# EAGLE board 11872_sound-detector-big.panel-v11 (EAGLE 7.5.0), part 1 of 4
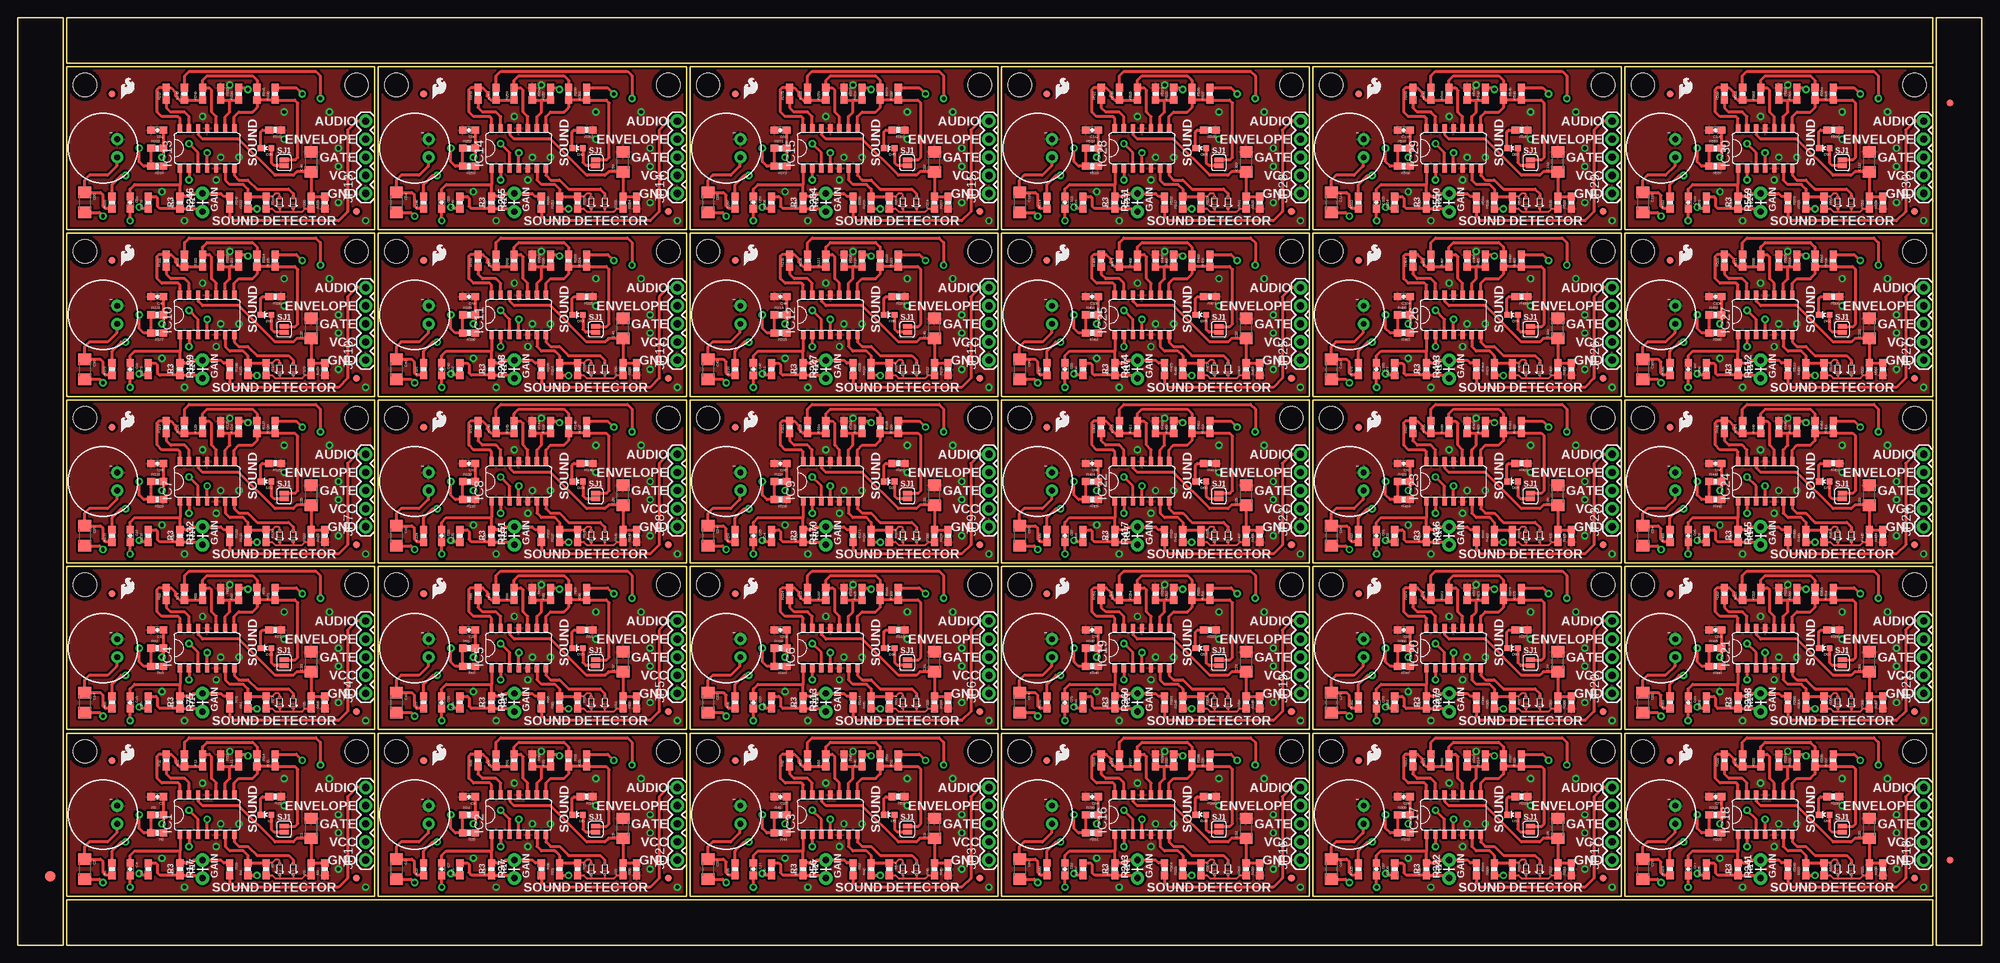
[diagram p0: board, top side]
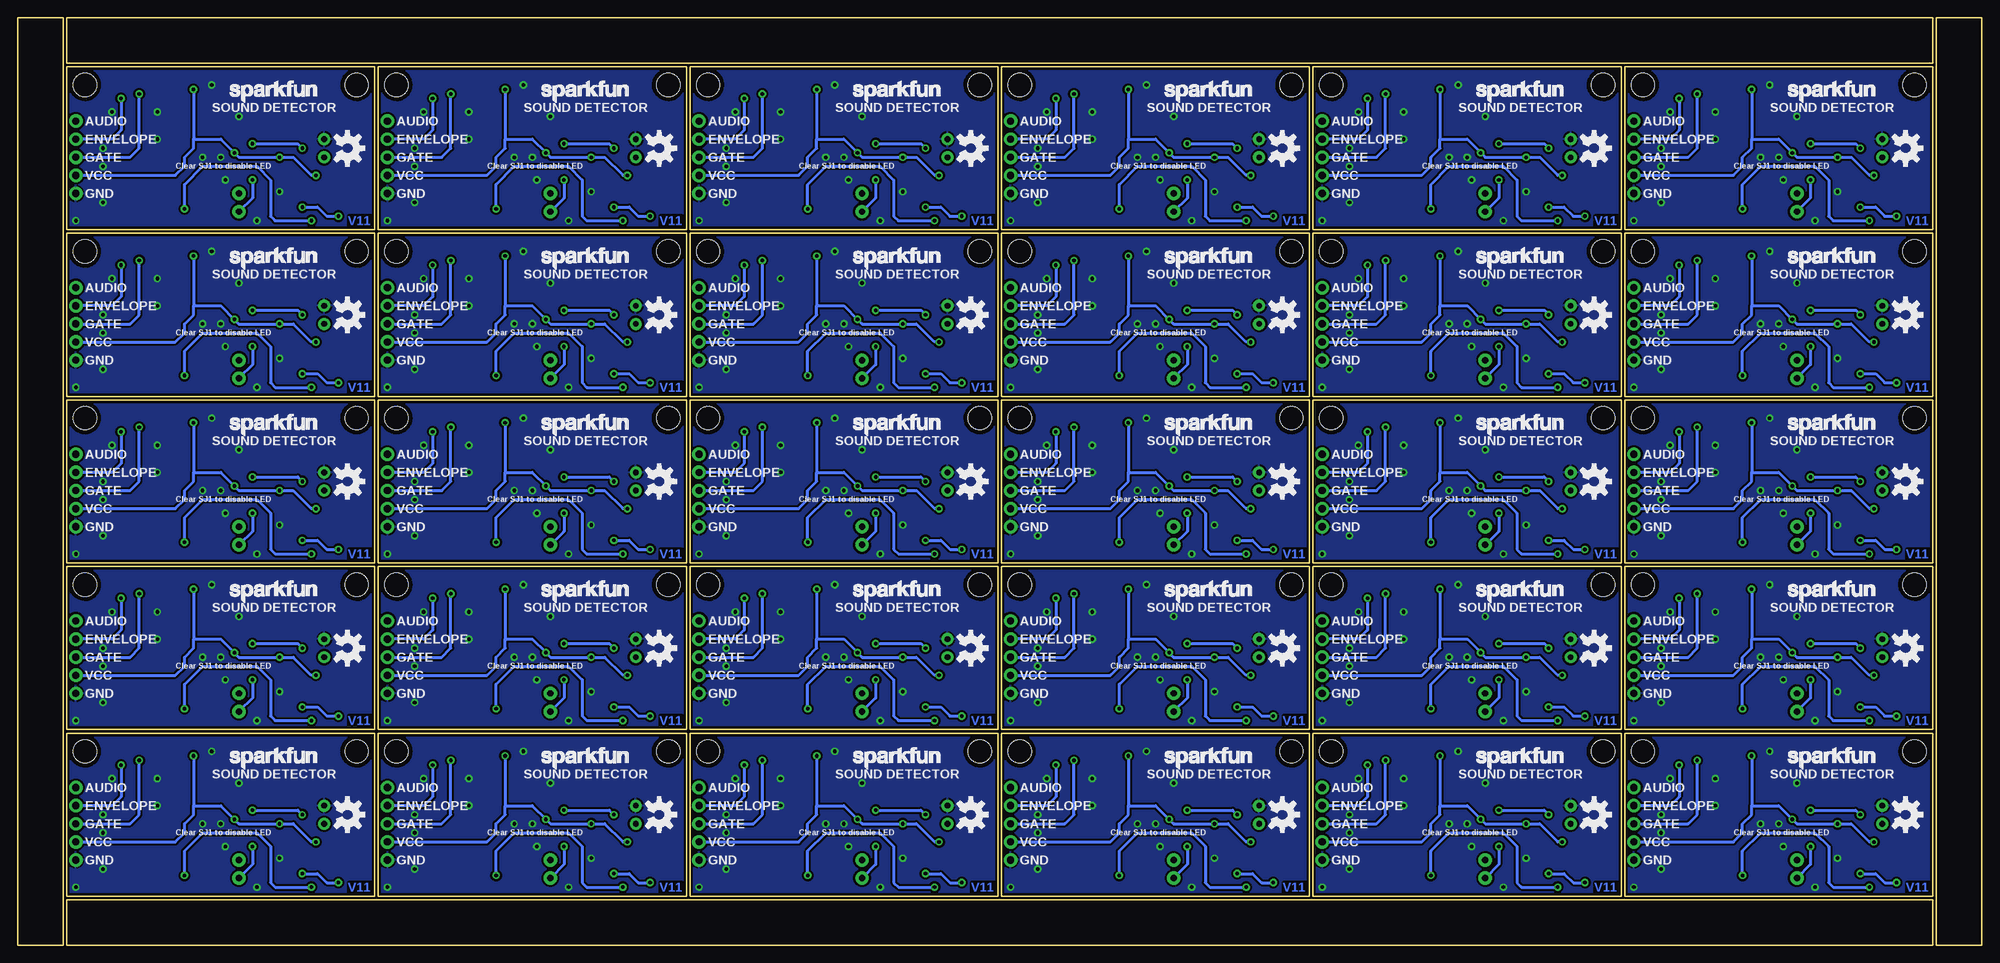
[diagram p1: board, bottom side, seen from below]

Size 275.34 x 130.05 mm. Coordinates in mm from the lower left corner, seen from the top.
Outline: 6.86,6.86 50.04,6.86 50.04,29.72 6.86,29.72 6.86,6.86
Outline: 50.55,6.86 93.73,6.86 93.73,29.72 50.55,29.72 50.55,6.86
Outline: 94.23,6.86 137.41,6.86 137.41,29.72 94.23,29.72 94.23,6.86
Outline: 6.86,30.23 50.04,30.23 50.04,53.09 6.86,53.09 6.86,30.23
Outline: 50.55,30.23 93.73,30.23 93.73,53.09 50.55,53.09 50.55,30.23
Outline: 94.23,30.23 137.41,30.23 137.41,53.09 94.23,53.09 94.23,30.23
Outline: 6.86,53.59 50.04,53.59 50.04,76.45 6.86,76.45 6.86,53.59
Outline: 50.55,53.59 93.73,53.59 93.73,76.45 50.55,76.45 50.55,53.59
Outline: 94.23,53.59 137.41,53.59 137.41,76.45 94.23,76.45 94.23,53.59
Outline: 6.86,76.96 50.04,76.96 50.04,99.82 6.86,99.82 6.86,76.96
Outline: 50.55,76.96 93.73,76.96 93.73,99.82 50.55,99.82 50.55,76.96
Outline: 94.23,76.96 137.41,76.96 137.41,99.82 94.23,99.82 94.23,76.96
Outline: 6.86,100.33 50.04,100.33 50.04,123.19 6.86,123.19 6.86,100.33
Outline: 50.55,100.33 93.73,100.33 93.73,123.19 50.55,123.19 50.55,100.33
Outline: 94.23,100.33 137.41,100.33 137.41,123.19 94.23,123.19 94.23,100.33
Outline: 6.35,0 6.35,130.05 0,130.05 0,0 6.35,0
Outline: 6.86,0 268.48,0 268.48,6.35 6.86,6.35 6.86,0
Outline: 275.34,0 275.34,130.05 268.99,130.05 268.99,0 275.34,0
Outline: 268.48,130.05 6.86,130.05 6.86,123.7 268.48,123.7 268.48,130.05
Outline: 137.92,6.86 181.1,6.86 181.1,29.72 137.92,29.72 137.92,6.86
Outline: 181.61,6.86 224.79,6.86 224.79,29.72 181.61,29.72 181.61,6.86
Outline: 225.3,6.86 268.48,6.86 268.48,29.72 225.3,29.72 225.3,6.86
Outline: 137.92,30.23 181.1,30.23 181.1,53.09 137.92,53.09 137.92,30.23
Outline: 181.61,30.23 224.79,30.23 224.79,53.09 181.61,53.09 181.61,30.23
Outline: 225.3,30.23 268.48,30.23 268.48,53.09 225.3,53.09 225.3,30.23
Outline: 137.92,53.59 181.1,53.59 181.1,76.45 137.92,76.45 137.92,53.59
Outline: 181.61,53.59 224.79,53.59 224.79,76.45 181.61,76.45 181.61,53.59
Outline: 225.3,53.59 268.48,53.59 268.48,76.45 225.3,76.45 225.3,53.59
Outline: 137.92,76.96 181.1,76.96 181.1,99.82 137.92,99.82 137.92,76.96
Outline: 181.61,76.96 224.79,76.96 224.79,99.82 181.61,99.82 181.61,76.96
Outline: 225.3,76.96 268.48,76.96 268.48,99.82 225.3,99.82 225.3,76.96
Outline: 137.92,100.33 181.1,100.33 181.1,123.19 137.92,123.19 137.92,100.33
Outline: 181.61,100.33 224.79,100.33 224.79,123.19 181.61,123.19 181.61,100.33
Outline: 225.3,100.33 268.48,100.33 268.48,123.19 225.3,123.19 225.3,100.33
Copper layers (1*16): Top 0.035mm / dielectric 1.5mm / Bottom 0.035mm
Design rules "SparkFun-2-layer *": minimum track width 7mil, minimum drill 15mil, track to track 8mil, track to pad 8mil, pad to pad 8mil, via to via 8mil, smd to smd 8mil, copper to edge 8mil, drill to drill 8mil, minimum pad ring 12mil, minimum via ring 10mil, stop-mask expansion 4mil, vias tented up to drill 20mil, thermal gap 10mil

## Footprints (pad centres in the part's own frame; a part is rotated, then mirrored left to right if it is on the bottom)
1206 = smd 1.6 x 1.8: 1 -1.4,0; 2 1.4,0
0603-CAP = smd 1.1 x 1: 1 -0.85,0; 2 0.85,0
SOD-523 = smd 0.4 x 0.4: A -0.7,0; C 0.7,0
LED-0603 = smd 0.8 x 0.8: A 0,-0.75; C 0,0.75
FIDUCIAL-1.5X3 = smd 1.5 x 1.5: 1 0,0
FIDUCIAL-1X2 = smd 1 x 1: 1 0,0
SO014 = smd 0.6 x 1.2: 1 -3.175,-2.8; 2 -1.905,-2.8; 3 -0.635,-2.8; 4 0.635,-2.8; 5 1.905,-2.8; 6 3.175,-2.8; 7 4.445,-2.8; 8 4.445,2.8; 9 3.175,2.8; 10 1.905,2.8; 11 0.635,2.8; 12 -0.635,2.8; 13 -1.905,2.8; 14 -3.175,2.8
1X05 = drill 1.016 pad 1.88: 1 0,0; 2 2.54,0; 3 5.08,0; 4 7.62,0; 5 10.16,0
MIC-9.7MM = drill 0.8 pad 1.676: 1 -2,1.27; 2 -2,-1.27
0603-RES = smd 1.1 x 1: 1 -0.85,0; 2 0.85,0
AXIAL-0.1EZ = drill 0.9 pad 1.88: P$1 0,0; P$2 2.54,0
SJ_2S = smd 0.635 x 1.27: 1 -0.412,0; 2 0.412,0
STAND-OFF = hole 3.302: 0,0

## Placement (x,y rotation side)
C1  10uF  [1206]  41.15,16.38 90 top
C2  10uF  [1206]  9.4,10.67 270 top
C3  1.0uF  [0603-CAP]  19.56,20.83 180 top
C4  1.0uF  [0603-CAP]  15.75,10.67 270 top
C5  10uF  [1206]  84.84,16.38 90 top
C6  10uF  [1206]  53.09,10.67 270 top
C7  1.0uF  [0603-CAP]  59.44,10.67 270 top
C8  1.0uF  [0603-CAP]  63.25,20.83 180 top
C9  10uF  [1206]  128.52,16.38 90 top
C10  10uF  [1206]  96.77,10.67 270 top
C11  1.0uF  [0603-CAP]  103.12,10.67 270 top
C12  1.0uF  [0603-CAP]  106.93,20.83 180 top
C13  10uF  [1206]  41.15,39.75 90 top
C14  10uF  [1206]  9.4,34.04 270 top
C15  1.0uF  [0603-CAP]  15.75,34.04 270 top
C16  1.0uF  [0603-CAP]  19.56,44.2 180 top
C17  10uF  [1206]  84.84,39.75 90 top
C18  10uF  [1206]  53.09,34.04 270 top
C19  1.0uF  [0603-CAP]  59.44,34.04 270 top
C20  1.0uF  [0603-CAP]  63.25,44.2 180 top
C21  10uF  [1206]  128.52,39.75 90 top
C22  10uF  [1206]  96.77,34.04 270 top
C23  1.0uF  [0603-CAP]  103.12,34.04 270 top
C24  1.0uF  [0603-CAP]  106.93,44.2 180 top
C25  10uF  [1206]  41.15,63.12 90 top
C26  10uF  [1206]  9.4,57.4 270 top
C27  1.0uF  [0603-CAP]  15.75,57.4 270 top
C28  1.0uF  [0603-CAP]  19.56,67.56 180 top
C29  10uF  [1206]  84.84,63.12 90 top
C30  10uF  [1206]  53.09,57.4 270 top
C31  1.0uF  [0603-CAP]  59.44,57.4 270 top
C32  1.0uF  [0603-CAP]  63.25,67.56 180 top
C33  10uF  [1206]  128.52,63.12 90 top
C34  10uF  [1206]  96.77,57.4 270 top
C35  1.0uF  [0603-CAP]  103.12,57.4 270 top
C36  1.0uF  [0603-CAP]  106.93,67.56 180 top
C37  10uF  [1206]  41.15,86.49 90 top
C38  10uF  [1206]  9.4,80.77 270 top
C39  1.0uF  [0603-CAP]  15.75,80.77 270 top
C40  1.0uF  [0603-CAP]  19.56,90.93 180 top
C41  10uF  [1206]  84.84,86.49 90 top
C42  10uF  [1206]  53.09,80.77 270 top
C43  1.0uF  [0603-CAP]  59.44,80.77 270 top
C44  1.0uF  [0603-CAP]  63.25,90.93 180 top
C45  10uF  [1206]  128.52,86.49 90 top
C46  10uF  [1206]  96.77,80.77 270 top
C47  1.0uF  [0603-CAP]  103.12,80.77 270 top
C48  1.0uF  [0603-CAP]  106.93,90.93 180 top
C49  10uF  [1206]  41.15,109.86 90 top
C50  10uF  [1206]  9.4,104.14 270 top
C51  1.0uF  [0603-CAP]  15.75,104.14 270 top
C52  1.0uF  [0603-CAP]  19.56,114.3 180 top
C53  10uF  [1206]  84.84,109.86 90 top
C54  10uF  [1206]  53.09,104.14 270 top
C55  1.0uF  [0603-CAP]  59.44,104.14 270 top
C56  1.0uF  [0603-CAP]  63.25,114.3 180 top
C57  10uF  [1206]  128.52,109.86 90 top
C58  10uF  [1206]  96.77,104.14 270 top
C59  1.0uF  [0603-CAP]  103.12,104.14 270 top
C60  1.0uF  [0603-CAP]  106.93,114.3 180 top
C61  10uF  [1206]  172.21,16.38 90 top
C62  10uF  [1206]  140.46,10.67 270 top
C63  1.0uF  [0603-CAP]  146.81,10.67 270 top
C64  1.0uF  [0603-CAP]  150.62,20.83 180 top
C65  10uF  [1206]  215.9,16.38 90 top
C66  10uF  [1206]  184.15,10.67 270 top
C67  1.0uF  [0603-CAP]  190.5,10.67 270 top
C68  1.0uF  [0603-CAP]  194.31,20.83 180 top
C69  10uF  [1206]  259.59,16.38 90 top
C70  10uF  [1206]  227.84,10.67 270 top
C71  1.0uF  [0603-CAP]  234.19,10.67 270 top
C72  1.0uF  [0603-CAP]  238,20.83 180 top
C73  10uF  [1206]  172.21,39.75 90 top
C74  10uF  [1206]  140.46,34.04 270 top
C75  1.0uF  [0603-CAP]  146.81,34.04 270 top
C76  1.0uF  [0603-CAP]  150.62,44.2 180 top
C77  10uF  [1206]  215.9,39.75 90 top
C78  10uF  [1206]  184.15,34.04 270 top
C79  1.0uF  [0603-CAP]  190.5,34.04 270 top
C80  1.0uF  [0603-CAP]  194.31,44.2 180 top
C81  10uF  [1206]  259.59,39.75 90 top
C82  10uF  [1206]  227.84,34.04 270 top
C83  1.0uF  [0603-CAP]  234.19,34.04 270 top
C84  1.0uF  [0603-CAP]  238,44.2 180 top
C85  10uF  [1206]  172.21,63.12 90 top
C86  10uF  [1206]  140.46,57.4 270 top
C87  1.0uF  [0603-CAP]  146.81,57.4 270 top
C88  1.0uF  [0603-CAP]  150.62,67.56 180 top
C89  10uF  [1206]  215.9,63.12 90 top
C90  10uF  [1206]  184.15,57.4 270 top
C91  1.0uF  [0603-CAP]  190.5,57.4 270 top
C92  1.0uF  [0603-CAP]  194.31,67.56 180 top
C93  10uF  [1206]  259.59,63.12 90 top
C94  10uF  [1206]  227.84,57.4 270 top
C95  1.0uF  [0603-CAP]  234.19,57.4 270 top
C96  1.0uF  [0603-CAP]  238,67.56 180 top
C97  10uF  [1206]  172.21,86.49 90 top
C98  10uF  [1206]  140.46,80.77 270 top
C99  1.0uF  [0603-CAP]  146.81,80.77 270 top
C100  1.0uF  [0603-CAP]  150.62,90.93 180 top
C101  10uF  [1206]  215.9,86.49 90 top
C102  10uF  [1206]  184.15,80.77 270 top
C103  1.0uF  [0603-CAP]  190.5,80.77 270 top
C104  1.0uF  [0603-CAP]  194.31,90.93 180 top
C105  10uF  [1206]  259.59,86.49 90 top
C106  10uF  [1206]  227.84,80.77 270 top
C107  1.0uF  [0603-CAP]  234.19,80.77 270 top
C108  1.0uF  [0603-CAP]  238,90.93 180 top
C109  10uF  [1206]  172.21,109.86 90 top
C110  10uF  [1206]  140.46,104.14 270 top
C111  1.0uF  [0603-CAP]  146.81,104.14 270 top
C112  1.0uF  [0603-CAP]  150.62,114.3 180 top
C113  10uF  [1206]  215.9,109.86 90 top
C114  10uF  [1206]  184.15,104.14 270 top
C115  1.0uF  [0603-CAP]  190.5,104.14 270 top
C116  1.0uF  [0603-CAP]  194.31,114.3 180 top
C117  10uF  [1206]  259.59,109.86 90 top
C118  10uF  [1206]  227.84,104.14 270 top
C119  1.0uF  [0603-CAP]  234.19,104.14 270 top
C120  1.0uF  [0603-CAP]  238,114.3 180 top
D1  RB751  [SOD-523]  36.7,10.67 270 top
D2  RB751  [SOD-523]  38.61,10.67 270 top
D3  RED  [LED-0603]  34.8,18.29 90 top
D4  RB751  [SOD-523]  80.39,10.67 270 top
D5  RB751  [SOD-523]  82.3,10.67 270 top
D6  RED  [LED-0603]  78.49,18.29 90 top
D7  RB751  [SOD-523]  124.08,10.67 270 top
D8  RB751  [SOD-523]  125.98,10.67 270 top
D9  RED  [LED-0603]  122.17,18.29 90 top
D10  RB751  [SOD-523]  36.7,34.04 270 top
D11  RB751  [SOD-523]  38.61,34.04 270 top
D12  RED  [LED-0603]  34.8,41.66 90 top
D13  RB751  [SOD-523]  80.39,34.04 270 top
D14  RB751  [SOD-523]  82.3,34.04 270 top
D15  RED  [LED-0603]  78.49,41.66 90 top
D16  RB751  [SOD-523]  124.08,34.04 270 top
D17  RB751  [SOD-523]  125.98,34.04 270 top
D18  RED  [LED-0603]  122.17,41.66 90 top
D19  RB751  [SOD-523]  36.7,57.4 270 top
D20  RB751  [SOD-523]  38.61,57.4 270 top
D21  RED  [LED-0603]  34.8,65.02 90 top
D22  RB751  [SOD-523]  80.39,57.4 270 top
D23  RB751  [SOD-523]  82.3,57.4 270 top
D24  RED  [LED-0603]  78.49,65.02 90 top
D25  RB751  [SOD-523]  124.08,57.4 270 top
D26  RB751  [SOD-523]  125.98,57.4 270 top
D27  RED  [LED-0603]  122.17,65.02 90 top
D28  RB751  [SOD-523]  36.7,80.77 270 top
D29  RB751  [SOD-523]  38.61,80.77 270 top
D30  RED  [LED-0603]  34.8,88.39 90 top
D31  RB751  [SOD-523]  80.39,80.77 270 top
D32  RB751  [SOD-523]  82.3,80.77 270 top
D33  RED  [LED-0603]  78.49,88.39 90 top
D34  RB751  [SOD-523]  124.08,80.77 270 top
D35  RB751  [SOD-523]  125.98,80.77 270 top
D36  RED  [LED-0603]  122.17,88.39 90 top
D37  RB751  [SOD-523]  36.7,104.14 270 top
D38  RB751  [SOD-523]  38.61,104.14 270 top
D39  RED  [LED-0603]  34.8,111.76 90 top
D40  RB751  [SOD-523]  80.39,104.14 270 top
D41  RB751  [SOD-523]  82.3,104.14 270 top
D42  RED  [LED-0603]  78.49,111.76 90 top
D43  RB751  [SOD-523]  124.08,104.14 270 top
D44  RB751  [SOD-523]  125.98,104.14 270 top
D45  RED  [LED-0603]  122.17,111.76 90 top
D46  RB751  [SOD-523]  167.77,10.67 270 top
D47  RB751  [SOD-523]  169.67,10.67 270 top
D48  RED  [LED-0603]  165.86,18.29 90 top
D49  RB751  [SOD-523]  211.46,10.67 270 top
D50  RB751  [SOD-523]  213.36,10.67 270 top
D51  RED  [LED-0603]  209.55,18.29 90 top
D52  RB751  [SOD-523]  255.14,10.67 270 top
D53  RB751  [SOD-523]  257.05,10.67 270 top
D54  RED  [LED-0603]  253.24,18.29 90 top
D55  RB751  [SOD-523]  167.77,34.04 270 top
D56  RB751  [SOD-523]  169.67,34.04 270 top
D57  RED  [LED-0603]  165.86,41.66 90 top
D58  RB751  [SOD-523]  211.46,34.04 270 top
D59  RB751  [SOD-523]  213.36,34.04 270 top
D60  RED  [LED-0603]  209.55,41.66 90 top
D61  RB751  [SOD-523]  255.14,34.04 270 top
D62  RB751  [SOD-523]  257.05,34.04 270 top
D63  RED  [LED-0603]  253.24,41.66 90 top
D64  RB751  [SOD-523]  167.77,57.4 270 top
D65  RB751  [SOD-523]  169.67,57.4 270 top
D66  RED  [LED-0603]  165.86,65.02 90 top
D67  RB751  [SOD-523]  211.46,57.4 270 top
D68  RB751  [SOD-523]  213.36,57.4 270 top
D69  RED  [LED-0603]  209.55,65.02 90 top
D70  RB751  [SOD-523]  255.14,57.4 270 top
D71  RB751  [SOD-523]  257.05,57.4 270 top
D72  RED  [LED-0603]  253.24,65.02 90 top
D73  RB751  [SOD-523]  167.77,80.77 270 top
D74  RB751  [SOD-523]  169.67,80.77 270 top
D75  RED  [LED-0603]  165.86,88.39 90 top
D76  RB751  [SOD-523]  211.46,80.77 270 top
D77  RB751  [SOD-523]  213.36,80.77 270 top
D78  RED  [LED-0603]  209.55,88.39 90 top
D79  RB751  [SOD-523]  255.14,80.77 270 top
D80  RB751  [SOD-523]  257.05,80.77 270 top
D81  RED  [LED-0603]  253.24,88.39 90 top
D82  RB751  [SOD-523]  167.77,104.14 270 top
D83  RB751  [SOD-523]  169.67,104.14 270 top
D84  RED  [LED-0603]  165.86,111.76 90 top
D85  RB751  [SOD-523]  211.46,104.14 270 top
D86  RB751  [SOD-523]  213.36,104.14 270 top
D87  RED  [LED-0603]  209.55,111.76 90 top
D88  RB751  [SOD-523]  255.14,104.14 270 top
D89  RB751  [SOD-523]  257.05,104.14 270 top
D90  RED  [LED-0603]  253.24,111.76 90 top
E$1  [FIDUCIAL-1.5X3]  4.57,9.65 0 top
E$4  [FIDUCIAL-1X2]  270.89,11.94 0 top
E$6  [FIDUCIAL-1X2]  270.89,118.11 180 top
FID1  FIDUCIAL1X2  [FIDUCIAL-1X2]  91.19,9.4 0 top
FID2  FIDUCIAL1X2  [FIDUCIAL-1X2]  56.9,25.91 0 top
FID3  FIDUCIAL1X2  [FIDUCIAL-1X2]  47.5,9.4 0 top
FID4  FIDUCIAL1X2  [FIDUCIAL-1X2]  13.21,25.91 0 top
FID5  FIDUCIAL1X2  [FIDUCIAL-1X2]  134.87,9.4 0 top
FID6  FIDUCIAL1X2  [FIDUCIAL-1X2]  100.58,25.91 0 top
FID7  FIDUCIAL1X2  [FIDUCIAL-1X2]  47.5,32.77 0 top
FID8  FIDUCIAL1X2  [FIDUCIAL-1X2]  13.21,49.28 0 top
FID9  FIDUCIAL1X2  [FIDUCIAL-1X2]  91.19,32.77 0 top
FID10  FIDUCIAL1X2  [FIDUCIAL-1X2]  56.9,49.28 0 top
FID11  FIDUCIAL1X2  [FIDUCIAL-1X2]  134.87,32.77 0 top
FID12  FIDUCIAL1X2  [FIDUCIAL-1X2]  100.58,49.28 0 top
FID13  FIDUCIAL1X2  [FIDUCIAL-1X2]  47.5,56.13 0 top
FID14  FIDUCIAL1X2  [FIDUCIAL-1X2]  13.21,72.64 0 top
FID15  FIDUCIAL1X2  [FIDUCIAL-1X2]  91.19,56.13 0 top
FID16  FIDUCIAL1X2  [FIDUCIAL-1X2]  56.9,72.64 0 top
FID17  FIDUCIAL1X2  [FIDUCIAL-1X2]  134.87,56.13 0 top
FID18  FIDUCIAL1X2  [FIDUCIAL-1X2]  100.58,72.64 0 top
FID19  FIDUCIAL1X2  [FIDUCIAL-1X2]  47.5,79.5 0 top
FID20  FIDUCIAL1X2  [FIDUCIAL-1X2]  13.21,96.01 0 top
FID21  FIDUCIAL1X2  [FIDUCIAL-1X2]  91.19,79.5 0 top
FID22  FIDUCIAL1X2  [FIDUCIAL-1X2]  56.9,96.01 0 top
FID23  FIDUCIAL1X2  [FIDUCIAL-1X2]  134.87,79.5 0 top
FID24  FIDUCIAL1X2  [FIDUCIAL-1X2]  100.58,96.01 0 top
FID25  FIDUCIAL1X2  [FIDUCIAL-1X2]  47.5,102.87 0 top
FID26  FIDUCIAL1X2  [FIDUCIAL-1X2]  13.21,119.38 0 top
FID27  FIDUCIAL1X2  [FIDUCIAL-1X2]  91.19,102.87 0 top
FID28  FIDUCIAL1X2  [FIDUCIAL-1X2]  56.9,119.38 0 top
FID29  FIDUCIAL1X2  [FIDUCIAL-1X2]  134.87,102.87 0 top
FID30  FIDUCIAL1X2  [FIDUCIAL-1X2]  100.58,119.38 0 top
FID31  FIDUCIAL1X2  [FIDUCIAL-1X2]  178.56,9.4 0 top
FID32  FIDUCIAL1X2  [FIDUCIAL-1X2]  144.27,25.91 0 top
FID33  FIDUCIAL1X2  [FIDUCIAL-1X2]  222.25,9.4 0 top
FID34  FIDUCIAL1X2  [FIDUCIAL-1X2]  187.96,25.91 0 top
FID35  FIDUCIAL1X2  [FIDUCIAL-1X2]  265.94,9.4 0 top
FID36  FIDUCIAL1X2  [FIDUCIAL-1X2]  231.65,25.91 0 top
FID37  FIDUCIAL1X2  [FIDUCIAL-1X2]  178.56,32.77 0 top
FID38  FIDUCIAL1X2  [FIDUCIAL-1X2]  144.27,49.28 0 top
FID39  FIDUCIAL1X2  [FIDUCIAL-1X2]  222.25,32.77 0 top
FID40  FIDUCIAL1X2  [FIDUCIAL-1X2]  187.96,49.28 0 top
FID41  FIDUCIAL1X2  [FIDUCIAL-1X2]  265.94,32.77 0 top
FID42  FIDUCIAL1X2  [FIDUCIAL-1X2]  231.65,49.28 0 top
FID43  FIDUCIAL1X2  [FIDUCIAL-1X2]  178.56,56.13 0 top
FID44  FIDUCIAL1X2  [FIDUCIAL-1X2]  144.27,72.64 0 top
FID45  FIDUCIAL1X2  [FIDUCIAL-1X2]  222.25,56.13 0 top
FID46  FIDUCIAL1X2  [FIDUCIAL-1X2]  187.96,72.64 0 top
FID47  FIDUCIAL1X2  [FIDUCIAL-1X2]  265.94,56.13 0 top
FID48  FIDUCIAL1X2  [FIDUCIAL-1X2]  231.65,72.64 0 top
FID49  FIDUCIAL1X2  [FIDUCIAL-1X2]  178.56,79.5 0 top
FID50  FIDUCIAL1X2  [FIDUCIAL-1X2]  144.27,96.01 0 top
FID51  FIDUCIAL1X2  [FIDUCIAL-1X2]  222.25,79.5 0 top
FID52  FIDUCIAL1X2  [FIDUCIAL-1X2]  187.96,96.01 0 top
FID53  FIDUCIAL1X2  [FIDUCIAL-1X2]  265.94,79.5 0 top
FID54  FIDUCIAL1X2  [FIDUCIAL-1X2]  231.65,96.01 0 top
FID55  FIDUCIAL1X2  [FIDUCIAL-1X2]  178.56,102.87 0 top
FID56  FIDUCIAL1X2  [FIDUCIAL-1X2]  144.27,119.38 0 top
FID57  FIDUCIAL1X2  [FIDUCIAL-1X2]  222.25,102.87 0 top
FID58  FIDUCIAL1X2  [FIDUCIAL-1X2]  187.96,119.38 0 top
FID59  FIDUCIAL1X2  [FIDUCIAL-1X2]  265.94,102.87 0 top
FID60  FIDUCIAL1X2  [FIDUCIAL-1X2]  231.65,119.38 0 top
IC1  LMV324  [SO014]  25.91,18.29 0 top
IC2  LMV324  [SO014]  69.6,18.29 0 top
IC3  LMV324  [SO014]  113.28,18.29 0 top
IC4  LMV324  [SO014]  25.91,41.66 0 top
IC5  LMV324  [SO014]  69.6,41.66 0 top
IC6  LMV324  [SO014]  113.28,41.66 0 top
IC7  LMV324  [SO014]  25.91,65.02 0 top
IC8  LMV324  [SO014]  69.6,65.02 0 top
IC9  LMV324  [SO014]  113.28,65.02 0 top
IC10  LMV324  [SO014]  25.91,88.39 0 top
IC11  LMV324  [SO014]  69.6,88.39 0 top
IC12  LMV324  [SO014]  113.28,88.39 0 top
IC13  LMV324  [SO014]  25.91,111.76 0 top
IC14  LMV324  [SO014]  69.6,111.76 0 top
IC15  LMV324  [SO014]  113.28,111.76 0 top
IC16  LMV324  [SO014]  156.97,18.29 0 top
IC17  LMV324  [SO014]  200.66,18.29 0 top
IC18  LMV324  [SO014]  244.35,18.29 0 top
IC19  LMV324  [SO014]  156.97,41.66 0 top
IC20  LMV324  [SO014]  200.66,41.66 0 top
IC21  LMV324  [SO014]  244.35,41.66 0 top
IC22  LMV324  [SO014]  156.97,65.02 0 top
IC23  LMV324  [SO014]  200.66,65.02 0 top
IC24  LMV324  [SO014]  244.35,65.02 0 top
IC25  LMV324  [SO014]  156.97,88.39 0 top
IC26  LMV324  [SO014]  200.66,88.39 0 top
IC27  LMV324  [SO014]  244.35,88.39 0 top
IC28  LMV324  [SO014]  156.97,111.76 0 top
IC29  LMV324  [SO014]  200.66,111.76 0 top
IC30  LMV324  [SO014]  244.35,111.76 0 top
JP1  IO Connector  [1X05]  48.77,11.94 90 top
JP2  IO Connector  [1X05]  92.46,11.94 90 top
JP3  IO Connector  [1X05]  136.14,11.94 90 top
JP4  IO Connector  [1X05]  48.77,35.31 90 top
JP5  IO Connector  [1X05]  92.46,35.31 90 top
JP6  IO Connector  [1X05]  136.14,35.31 90 top
JP7  IO Connector  [1X05]  48.77,58.67 90 top
JP8  IO Connector  [1X05]  92.46,58.67 90 top
JP9  IO Connector  [1X05]  136.14,58.67 90 top
JP10  IO Connector  [1X05]  48.77,82.04 90 top
JP11  IO Connector  [1X05]  92.46,82.04 90 top
JP12  IO Connector  [1X05]  136.14,82.04 90 top
JP13  IO Connector  [1X05]  48.77,105.41 90 top
JP14  IO Connector  [1X05]  92.46,105.41 90 top
JP15  IO Connector  [1X05]  136.14,105.41 90 top
JP16  IO Connector  [1X05]  179.83,11.94 90 top
JP17  IO Connector  [1X05]  223.52,11.94 90 top
JP18  IO Connector  [1X05]  267.21,11.94 90 top
JP19  IO Connector  [1X05]  179.83,35.31 90 top
JP20  IO Connector  [1X05]  223.52,35.31 90 top
JP21  IO Connector  [1X05]  267.21,35.31 90 top
JP22  IO Connector  [1X05]  179.83,58.67 90 top
JP23  IO Connector  [1X05]  223.52,58.67 90 top
JP24  IO Connector  [1X05]  267.21,58.67 90 top
JP25  IO Connector  [1X05]  179.83,82.04 90 top
JP26  IO Connector  [1X05]  223.52,82.04 90 top
JP27  IO Connector  [1X05]  267.21,82.04 90 top
JP28  IO Connector  [1X05]  179.83,105.41 90 top
JP29  IO Connector  [1X05]  223.52,105.41 90 top
JP30  IO Connector  [1X05]  267.21,105.41 90 top
LOGO1  OSHW-LOGOM  [OSHW-LOGO-M]  10.67,18.29 270 bottom
LOGO2  LOGO-SFENW2  [SFE-NEW-WEB]  27.18,24.64 0 bottom
LOGO3  LOGO-SFESK  [SFE-LOGO-FLAME]  14.48,25.27 0 top
LOGO4  OSHW-LOGOM  [OSHW-LOGO-M]  54.36,18.29 270 bottom
LOGO5  LOGO-SFENW2  [SFE-NEW-WEB]  70.87,24.64 0 bottom
LOGO6  LOGO-SFESK  [SFE-LOGO-FLAME]  58.17,25.27 0 top
LOGO7  OSHW-LOGOM  [OSHW-LOGO-M]  98.04,18.29 270 bottom
LOGO8  LOGO-SFENW2  [SFE-NEW-WEB]  114.55,24.64 0 bottom
LOGO9  LOGO-SFESK  [SFE-LOGO-FLAME]  101.85,25.27 0 top
LOGO10  OSHW-LOGOM  [OSHW-LOGO-M]  10.67,41.66 270 bottom
LOGO11  LOGO-SFENW2  [SFE-NEW-WEB]  27.18,48.01 0 bottom
LOGO12  LOGO-SFESK  [SFE-LOGO-FLAME]  14.48,48.64 0 top
LOGO13  OSHW-LOGOM  [OSHW-LOGO-M]  54.36,41.66 270 bottom
LOGO14  LOGO-SFENW2  [SFE-NEW-WEB]  70.87,48.01 0 bottom
LOGO15  LOGO-SFESK  [SFE-LOGO-FLAME]  58.17,48.64 0 top
LOGO16  OSHW-LOGOM  [OSHW-LOGO-M]  98.04,41.66 270 bottom
LOGO17  LOGO-SFENW2  [SFE-NEW-WEB]  114.55,48.01 0 bottom
LOGO18  LOGO-SFESK  [SFE-LOGO-FLAME]  101.85,48.64 0 top
LOGO19  OSHW-LOGOM  [OSHW-LOGO-M]  10.67,65.02 270 bottom
LOGO20  LOGO-SFENW2  [SFE-NEW-WEB]  27.18,71.37 0 bottom
LOGO21  LOGO-SFESK  [SFE-LOGO-FLAME]  14.48,72.01 0 top
LOGO22  OSHW-LOGOM  [OSHW-LOGO-M]  54.36,65.02 270 bottom
LOGO23  LOGO-SFENW2  [SFE-NEW-WEB]  70.87,71.37 0 bottom
LOGO24  LOGO-SFESK  [SFE-LOGO-FLAME]  58.17,72.01 0 top
LOGO25  OSHW-LOGOM  [OSHW-LOGO-M]  98.04,65.02 270 bottom
LOGO26  LOGO-SFENW2  [SFE-NEW-WEB]  114.55,71.37 0 bottom
LOGO27  LOGO-SFESK  [SFE-LOGO-FLAME]  101.85,72.01 0 top
LOGO28  OSHW-LOGOM  [OSHW-LOGO-M]  10.67,88.39 270 bottom
LOGO29  LOGO-SFENW2  [SFE-NEW-WEB]  27.18,94.74 0 bottom
LOGO30  LOGO-SFESK  [SFE-LOGO-FLAME]  14.48,95.38 0 top
LOGO31  OSHW-LOGOM  [OSHW-LOGO-M]  54.36,88.39 270 bottom
LOGO32  LOGO-SFENW2  [SFE-NEW-WEB]  70.87,94.74 0 bottom
LOGO33  LOGO-SFESK  [SFE-LOGO-FLAME]  58.17,95.38 0 top
LOGO34  OSHW-LOGOM  [OSHW-LOGO-M]  98.04,88.39 270 bottom
LOGO35  LOGO-SFENW2  [SFE-NEW-WEB]  114.55,94.74 0 bottom
LOGO36  LOGO-SFESK  [SFE-LOGO-FLAME]  101.85,95.38 0 top
LOGO37  OSHW-LOGOM  [OSHW-LOGO-M]  10.67,111.76 270 bottom
LOGO38  LOGO-SFENW2  [SFE-NEW-WEB]  27.18,118.11 0 bottom
LOGO39  LOGO-SFESK  [SFE-LOGO-FLAME]  14.48,118.75 0 top
LOGO40  OSHW-LOGOM  [OSHW-LOGO-M]  54.36,111.76 270 bottom
LOGO41  LOGO-SFENW2  [SFE-NEW-WEB]  70.87,118.11 0 bottom
LOGO42  LOGO-SFESK  [SFE-LOGO-FLAME]  58.17,118.75 0 top
LOGO43  OSHW-LOGOM  [OSHW-LOGO-M]  98.04,111.76 270 bottom
LOGO44  LOGO-SFENW2  [SFE-NEW-WEB]  114.55,118.11 0 bottom
LOGO45  LOGO-SFESK  [SFE-LOGO-FLAME]  101.85,118.75 0 top
LOGO46  OSHW-LOGOM  [OSHW-LOGO-M]  141.73,18.29 270 bottom
LOGO47  LOGO-SFENW2  [SFE-NEW-WEB]  158.24,24.64 0 bottom
LOGO48  LOGO-SFESK  [SFE-LOGO-FLAME]  145.54,25.27 0 top
LOGO49  OSHW-LOGOM  [OSHW-LOGO-M]  185.42,18.29 270 bottom
LOGO50  LOGO-SFENW2  [SFE-NEW-WEB]  201.93,24.64 0 bottom
LOGO51  LOGO-SFESK  [SFE-LOGO-FLAME]  189.23,25.27 0 top
LOGO52  OSHW-LOGOM  [OSHW-LOGO-M]  229.11,18.29 270 bottom
LOGO53  LOGO-SFENW2  [SFE-NEW-WEB]  245.62,24.64 0 bottom
LOGO54  LOGO-SFESK  [SFE-LOGO-FLAME]  232.92,25.27 0 top
LOGO55  OSHW-LOGOM  [OSHW-LOGO-M]  141.73,41.66 270 bottom
LOGO56  LOGO-SFENW2  [SFE-NEW-WEB]  158.24,48.01 0 bottom
LOGO57  LOGO-SFESK  [SFE-LOGO-FLAME]  145.54,48.64 0 top
LOGO58  OSHW-LOGOM  [OSHW-LOGO-M]  185.42,41.66 270 bottom
LOGO59  LOGO-SFENW2  [SFE-NEW-WEB]  201.93,48.01 0 bottom
LOGO60  LOGO-SFESK  [SFE-LOGO-FLAME]  189.23,48.64 0 top
LOGO61  OSHW-LOGOM  [OSHW-LOGO-M]  229.11,41.66 270 bottom
LOGO62  LOGO-SFENW2  [SFE-NEW-WEB]  245.62,48.01 0 bottom
LOGO63  LOGO-SFESK  [SFE-LOGO-FLAME]  232.92,48.64 0 top
LOGO64  OSHW-LOGOM  [OSHW-LOGO-M]  141.73,65.02 270 bottom
LOGO65  LOGO-SFENW2  [SFE-NEW-WEB]  158.24,71.37 0 bottom
LOGO66  LOGO-SFESK  [SFE-LOGO-FLAME]  145.54,72.01 0 top
LOGO67  OSHW-LOGOM  [OSHW-LOGO-M]  185.42,65.02 270 bottom
LOGO68  LOGO-SFENW2  [SFE-NEW-WEB]  201.93,71.37 0 bottom
LOGO69  LOGO-SFESK  [SFE-LOGO-FLAME]  189.23,72.01 0 top
LOGO70  OSHW-LOGOM  [OSHW-LOGO-M]  229.11,65.02 270 bottom
LOGO71  LOGO-SFENW2  [SFE-NEW-WEB]  245.62,71.37 0 bottom
LOGO72  LOGO-SFESK  [SFE-LOGO-FLAME]  232.92,72.01 0 top
LOGO73  OSHW-LOGOM  [OSHW-LOGO-M]  141.73,88.39 270 bottom
LOGO74  LOGO-SFENW2  [SFE-NEW-WEB]  158.24,94.74 0 bottom
LOGO75  LOGO-SFESK  [SFE-LOGO-FLAME]  145.54,95.38 0 top
LOGO76  OSHW-LOGOM  [OSHW-LOGO-M]  185.42,88.39 270 bottom
LOGO77  LOGO-SFENW2  [SFE-NEW-WEB]  201.93,94.74 0 bottom
LOGO78  LOGO-SFESK  [SFE-LOGO-FLAME]  189.23,95.38 0 top
LOGO79  OSHW-LOGOM  [OSHW-LOGO-M]  229.11,88.39 270 bottom
LOGO80  LOGO-SFENW2  [SFE-NEW-WEB]  245.62,94.74 0 bottom
LOGO81  LOGO-SFESK  [SFE-LOGO-FLAME]  232.92,95.38 0 top
LOGO82  OSHW-LOGOM  [OSHW-LOGO-M]  141.73,111.76 270 bottom
LOGO83  LOGO-SFENW2  [SFE-NEW-WEB]  158.24,118.11 0 bottom
LOGO84  LOGO-SFESK  [SFE-LOGO-FLAME]  145.54,118.75 0 top
LOGO85  OSHW-LOGOM  [OSHW-LOGO-M]  185.42,111.76 270 bottom
LOGO86  LOGO-SFENW2  [SFE-NEW-WEB]  201.93,118.11 0 bottom
LOGO87  LOGO-SFESK  [SFE-LOGO-FLAME]  189.23,118.75 0 top
LOGO88  OSHW-LOGOM  [OSHW-LOGO-M]  229.11,111.76 270 bottom
LOGO89  LOGO-SFENW2  [SFE-NEW-WEB]  245.62,118.11 0 bottom
LOGO90  LOGO-SFESK  [SFE-LOGO-FLAME]  232.92,118.75 0 top
MIC1  MIC9.7MM  [MIC-9.7MM]  11.94,18.29 180 top
MIC2  MIC9.7MM  [MIC-9.7MM]  55.63,18.29 180 top
MIC3  MIC9.7MM  [MIC-9.7MM]  99.31,18.29 180 top
MIC4  MIC9.7MM  [MIC-9.7MM]  11.94,41.66 180 top
MIC5  MIC9.7MM  [MIC-9.7MM]  55.63,41.66 180 top
MIC6  MIC9.7MM  [MIC-9.7MM]  99.31,41.66 180 top
MIC7  MIC9.7MM  [MIC-9.7MM]  11.94,65.02 180 top
MIC8  MIC9.7MM  [MIC-9.7MM]  55.63,65.02 180 top
MIC9  MIC9.7MM  [MIC-9.7MM]  99.31,65.02 180 top
MIC10  MIC9.7MM  [MIC-9.7MM]  11.94,88.39 180 top
MIC11  MIC9.7MM  [MIC-9.7MM]  55.63,88.39 180 top
MIC12  MIC9.7MM  [MIC-9.7MM]  99.31,88.39 180 top
MIC13  MIC9.7MM  [MIC-9.7MM]  11.94,111.76 180 top
MIC14  MIC9.7MM  [MIC-9.7MM]  55.63,111.76 180 top
MIC15  MIC9.7MM  [MIC-9.7MM]  99.31,111.76 180 top
MIC16  MIC9.7MM  [MIC-9.7MM]  143,18.29 180 top
MIC17  MIC9.7MM  [MIC-9.7MM]  186.69,18.29 180 top
MIC18  MIC9.7MM  [MIC-9.7MM]  230.38,18.29 180 top
MIC19  MIC9.7MM  [MIC-9.7MM]  143,41.66 180 top
MIC20  MIC9.7MM  [MIC-9.7MM]  186.69,41.66 180 top
MIC21  MIC9.7MM  [MIC-9.7MM]  230.38,41.66 180 top
MIC22  MIC9.7MM  [MIC-9.7MM]  143,65.02 180 top
MIC23  MIC9.7MM  [MIC-9.7MM]  186.69,65.02 180 top
MIC24  MIC9.7MM  [MIC-9.7MM]  230.38,65.02 180 top
MIC25  MIC9.7MM  [MIC-9.7MM]  143,88.39 180 top
MIC26  MIC9.7MM  [MIC-9.7MM]  186.69,88.39 180 top
MIC27  MIC9.7MM  [MIC-9.7MM]  230.38,88.39 180 top
MIC28  MIC9.7MM  [MIC-9.7MM]  143,111.76 180 top
MIC29  MIC9.7MM  [MIC-9.7MM]  186.69,111.76 180 top
MIC30  MIC9.7MM  [MIC-9.7MM]  230.38,111.76 180 top
R1  2.2k  [0603-RES]  13.21,10.67 90 top
R2  1K  [0603-RES]  18.29,10.67 90 top
R3  100k  [0603-RES]  22.73,10.67 90 top
R4  10K  [0603-RES]  32.26,10.67 90 top
R5  10K  [0603-RES]  19.56,18.29 0 top
R6  10K  [0603-RES]  19.56,15.75 180 top
R7  22K  [0603-RES]  34.8,10.67 270 top
R8  100  [0603-RES]  41.15,10.67 90 top
R9  10K  [0603-RES]  43.05,10.67 90 top
R10  1K  [0603-RES]  20.83,25.91 90 top
R11  100k  [0603-RES]  30.99,25.91 90 top
R12  3.3k  [0603-RES]  28.45,25.91 270 top
R13  1K  [0603-RES]  25.91,25.91 90 top
R14  100k  [0603-RES]  33.53,25.91 270 top
R15  100  [0603-RES]  36.07,25.91 90 top
R16  2.2k  [0603-RES]  36.07,20.83 180 top
R17  GAIN  [AXIAL-0.1EZ]  25.91,9.4 90 top
R18  100  [0603-RES]  23.37,25.91 90 top
R19  100  [0603-RES]  29.72,10.67 270 top
R20  2.2k  [0603-RES]  56.9,10.67 90 top
R21  1K  [0603-RES]  61.98,10.67 90 top
R22  100k  [0603-RES]  66.42,10.67 90 top
R23  10K  [0603-RES]  75.95,10.67 90 top
R24  10K  [0603-RES]  63.25,18.29 0 top
R25  10K  [0603-RES]  63.25,15.75 180 top
R26  10K  [0603-RES]  86.74,10.67 90 top
R27  100  [0603-RES]  84.84,10.67 90 top
R28  1K  [0603-RES]  64.52,25.91 90 top
R29  100k  [0603-RES]  74.68,25.91 90 top
R30  3.3k  [0603-RES]  72.14,25.91 270 top
R31  1K  [0603-RES]  69.6,25.91 90 top
R32  100k  [0603-RES]  77.22,25.91 270 top
R33  100  [0603-RES]  79.76,25.91 90 top
R34  2.2k  [0603-RES]  79.76,20.83 180 top
R35  22K  [0603-RES]  78.49,10.67 270 top
R36  100  [0603-RES]  67.06,25.91 90 top
R37  GAIN  [AXIAL-0.1EZ]  69.6,9.4 90 top
R38  100  [0603-RES]  73.41,10.67 270 top
R39  2.2k  [0603-RES]  100.58,10.67 90 top
R40  1K  [0603-RES]  105.66,10.67 90 top
R41  100k  [0603-RES]  110.11,10.67 90 top
R42  10K  [0603-RES]  119.63,10.67 90 top
R43  10K  [0603-RES]  106.93,18.29 0 top
R44  10K  [0603-RES]  106.93,15.75 180 top
R45  10K  [0603-RES]  130.43,10.67 90 top
R46  100  [0603-RES]  128.52,10.67 90 top
R47  1K  [0603-RES]  108.2,25.91 90 top
R48  100k  [0603-RES]  118.36,25.91 90 top
R49  3.3k  [0603-RES]  115.82,25.91 270 top
R50  1K  [0603-RES]  113.28,25.91 90 top
R51  100k  [0603-RES]  120.9,25.91 270 top
R52  100  [0603-RES]  123.44,25.91 90 top
R53  2.2k  [0603-RES]  123.44,20.83 180 top
R54  22K  [0603-RES]  122.17,10.67 270 top
R55  100  [0603-RES]  110.74,25.91 90 top
R56  GAIN  [AXIAL-0.1EZ]  113.28,9.4 90 top
R57  100  [0603-RES]  117.09,10.67 270 top
R58  2.2k  [0603-RES]  13.21,34.04 90 top
R59  1K  [0603-RES]  18.29,34.04 90 top
R60  100k  [0603-RES]  22.73,34.04 90 top
R61  10K  [0603-RES]  32.26,34.04 90 top
R62  10K  [0603-RES]  19.56,41.66 0 top
R63  10K  [0603-RES]  19.56,39.12 180 top
R64  10K  [0603-RES]  43.05,34.04 90 top
R65  100  [0603-RES]  41.15,34.04 90 top
R66  1K  [0603-RES]  20.83,49.28 90 top
R67  100k  [0603-RES]  30.99,49.28 90 top
R68  3.3k  [0603-RES]  28.45,49.28 270 top
R69  1K  [0603-RES]  25.91,49.28 90 top
R70  100k  [0603-RES]  33.53,49.28 270 top
R71  100  [0603-RES]  36.07,49.28 90 top
R72  2.2k  [0603-RES]  36.07,44.2 180 top
R73  22K  [0603-RES]  34.8,34.04 270 top
R74  100  [0603-RES]  23.37,49.28 90 top
R75  GAIN  [AXIAL-0.1EZ]  25.91,32.77 90 top
R76  100  [0603-RES]  29.72,34.04 270 top
R77  2.2k  [0603-RES]  56.9,34.04 90 top
R78  1K  [0603-RES]  61.98,34.04 90 top
R79  100k  [0603-RES]  66.42,34.04 90 top
R80  10K  [0603-RES]  75.95,34.04 90 top
R81  10K  [0603-RES]  63.25,41.66 0 top
R82  10K  [0603-RES]  63.25,39.12 180 top
R83  10K  [0603-RES]  86.74,34.04 90 top
R84  100  [0603-RES]  84.84,34.04 90 top
R85  1K  [0603-RES]  64.52,49.28 90 top
R86  100k  [0603-RES]  74.68,49.28 90 top
R87  3.3k  [0603-RES]  72.14,49.28 270 top
R88  1K  [0603-RES]  69.6,49.28 90 top
R89  100k  [0603-RES]  77.22,49.28 270 top
R90  100  [0603-RES]  79.76,49.28 90 top
R91  2.2k  [0603-RES]  79.76,44.2 180 top
R92  22K  [0603-RES]  78.49,34.04 270 top
R93  100  [0603-RES]  67.06,49.28 90 top
R94  GAIN  [AXIAL-0.1EZ]  69.6,32.77 90 top
R95  100  [0603-RES]  73.41,34.04 270 top
R96  2.2k  [0603-RES]  100.58,34.04 90 top
R97  1K  [0603-RES]  105.66,34.04 90 top
R98  100k  [0603-RES]  110.11,34.04 90 top
R99  10K  [0603-RES]  119.63,34.04 90 top
R100  10K  [0603-RES]  106.93,41.66 0 top
R101  10K  [0603-RES]  106.93,39.12 180 top
R102  10K  [0603-RES]  130.43,34.04 90 top
R103  100  [0603-RES]  128.52,34.04 90 top
R104  1K  [0603-RES]  108.2,49.28 90 top
R105  100k  [0603-RES]  118.36,49.28 90 top
R106  3.3k  [0603-RES]  115.82,49.28 270 top
R107  1K  [0603-RES]  113.28,49.28 90 top
R108  100k  [0603-RES]  120.9,49.28 270 top
R109  100  [0603-RES]  123.44,49.28 90 top
R110  2.2k  [0603-RES]  123.44,44.2 180 top
R111  22K  [0603-RES]  122.17,34.04 270 top
R112  100  [0603-RES]  110.74,49.28 90 top
R113  GAIN  [AXIAL-0.1EZ]  113.28,32.77 90 top
R114  100  [0603-RES]  117.09,34.04 270 top
R115  2.2k  [0603-RES]  13.21,57.4 90 top
R116  1K  [0603-RES]  18.29,57.4 90 top
R117  100k  [0603-RES]  22.73,57.4 90 top
R118  10K  [0603-RES]  32.26,57.4 90 top
R119  10K  [0603-RES]  19.56,65.02 0 top
R120  10K  [0603-RES]  19.56,62.48 180 top
R121  10K  [0603-RES]  43.05,57.4 90 top
R122  100  [0603-RES]  41.15,57.4 90 top
R123  1K  [0603-RES]  20.83,72.64 90 top
R124  100k  [0603-RES]  30.99,72.64 90 top
R125  3.3k  [0603-RES]  28.45,72.64 270 top
R126  1K  [0603-RES]  25.91,72.64 90 top
R127  100k  [0603-RES]  33.53,72.64 270 top
R128  100  [0603-RES]  36.07,72.64 90 top
R129  2.2k  [0603-RES]  36.07,67.56 180 top
R130  22K  [0603-RES]  34.8,57.4 270 top
R131  100  [0603-RES]  23.37,72.64 90 top
R132  GAIN  [AXIAL-0.1EZ]  25.91,56.13 90 top
R133  100  [0603-RES]  29.72,57.4 270 top
R134  2.2k  [0603-RES]  56.9,57.4 90 top
R135  1K  [0603-RES]  61.98,57.4 90 top
R136  100k  [0603-RES]  66.42,57.4 90 top
R137  10K  [0603-RES]  75.95,57.4 90 top
R138  10K  [0603-RES]  63.25,65.02 0 top
R139  10K  [0603-RES]  63.25,62.48 180 top
R140  10K  [0603-RES]  86.74,57.4 90 top
R141  100  [0603-RES]  84.84,57.4 90 top
R142  1K  [0603-RES]  64.52,72.64 90 top
R143  100k  [0603-RES]  74.68,72.64 90 top
R144  3.3k  [0603-RES]  72.14,72.64 270 top
R145  1K  [0603-RES]  69.6,72.64 90 top
R146  100k  [0603-RES]  77.22,72.64 270 top
R147  100  [0603-RES]  79.76,72.64 90 top
R148  2.2k  [0603-RES]  79.76,67.56 180 top
R149  22K  [0603-RES]  78.49,57.4 270 top
R150  100  [0603-RES]  67.06,72.64 90 top
R151  GAIN  [AXIAL-0.1EZ]  69.6,56.13 90 top
R152  100  [0603-RES]  73.41,57.4 270 top
R153  2.2k  [0603-RES]  100.58,57.4 90 top
R154  1K  [0603-RES]  105.66,57.4 90 top
R155  100k  [0603-RES]  110.11,57.4 90 top
R156  10K  [0603-RES]  119.63,57.4 90 top
R157  10K  [0603-RES]  106.93,65.02 0 top
R158  10K  [0603-RES]  106.93,62.48 180 top
R159  10K  [0603-RES]  130.43,57.4 90 top
R160  100  [0603-RES]  128.52,57.4 90 top
R161  1K  [0603-RES]  108.2,72.64 90 top
R162  100k  [0603-RES]  118.36,72.64 90 top
R163  3.3k  [0603-RES]  115.82,72.64 270 top
R164  1K  [0603-RES]  113.28,72.64 90 top
R165  100k  [0603-RES]  120.9,72.64 270 top
R166  100  [0603-RES]  123.44,72.64 90 top
R167  2.2k  [0603-RES]  123.44,67.56 180 top
R168  22K  [0603-RES]  122.17,57.4 270 top
R169  100  [0603-RES]  110.74,72.64 90 top
R170  GAIN  [AXIAL-0.1EZ]  113.28,56.13 90 top
R171  100  [0603-RES]  117.09,57.4 270 top
R172  2.2k  [0603-RES]  13.21,80.77 90 top
R173  1K  [0603-RES]  18.29,80.77 90 top
R174  100k  [0603-RES]  22.73,80.77 90 top
R175  10K  [0603-RES]  32.26,80.77 90 top
R176  10K  [0603-RES]  19.56,88.39 0 top
R177  10K  [0603-RES]  19.56,85.85 180 top
R178  10K  [0603-RES]  43.05,80.77 90 top
R179  100  [0603-RES]  41.15,80.77 90 top
R180  1K  [0603-RES]  20.83,96.01 90 top
R181  100k  [0603-RES]  30.99,96.01 90 top
R182  3.3k  [0603-RES]  28.45,96.01 270 top
R183  1K  [0603-RES]  25.91,96.01 90 top
R184  100k  [0603-RES]  33.53,96.01 270 top
R185  100  [0603-RES]  36.07,96.01 90 top
R186  2.2k  [0603-RES]  36.07,90.93 180 top
R187  22K  [0603-RES]  34.8,80.77 270 top
R188  100  [0603-RES]  23.37,96.01 90 top
R189  GAIN  [AXIAL-0.1EZ]  25.91,79.5 90 top
R190  100  [0603-RES]  29.72,80.77 270 top
R191  2.2k  [0603-RES]  56.9,80.77 90 top
R192  1K  [0603-RES]  61.98,80.77 90 top
R193  100k  [0603-RES]  66.42,80.77 90 top
R194  10K  [0603-RES]  75.95,80.77 90 top
R195  10K  [0603-RES]  63.25,88.39 0 top
R196  10K  [0603-RES]  63.25,85.85 180 top
R197  10K  [0603-RES]  86.74,80.77 90 top
R198  100  [0603-RES]  84.84,80.77 90 top
R199  1K  [0603-RES]  64.52,96.01 90 top
R200  100k  [0603-RES]  74.68,96.01 90 top
R201  3.3k  [0603-RES]  72.14,96.01 270 top
R202  1K  [0603-RES]  69.6,96.01 90 top
R203  100k  [0603-RES]  77.22,96.01 270 top
R204  100  [0603-RES]  79.76,96.01 90 top
R205  2.2k  [0603-RES]  79.76,90.93 180 top
R206  22K  [0603-RES]  78.49,80.77 270 top
R207  100  [0603-RES]  67.06,96.01 90 top
R208  GAIN  [AXIAL-0.1EZ]  69.6,79.5 90 top
R209  100  [0603-RES]  73.41,80.77 270 top
R210  2.2k  [0603-RES]  100.58,80.77 90 top
R211  1K  [0603-RES]  105.66,80.77 90 top
R212  100k  [0603-RES]  110.11,80.77 90 top
R213  10K  [0603-RES]  119.63,80.77 90 top
R214  10K  [0603-RES]  106.93,88.39 0 top
R215  10K  [0603-RES]  106.93,85.85 180 top
R216  10K  [0603-RES]  130.43,80.77 90 top
R217  100  [0603-RES]  128.52,80.77 90 top
R218  1K  [0603-RES]  108.2,96.01 90 top
R219  100k  [0603-RES]  118.36,96.01 90 top
R220  3.3k  [0603-RES]  115.82,96.01 270 top
R221  1K  [0603-RES]  113.28,96.01 90 top
R222  100k  [0603-RES]  120.9,96.01 270 top
R223  100  [0603-RES]  123.44,96.01 90 top
R224  2.2k  [0603-RES]  123.44,90.93 180 top
R225  22K  [0603-RES]  122.17,80.77 270 top
R226  100  [0603-RES]  110.74,96.01 90 top
R227  GAIN  [AXIAL-0.1EZ]  113.28,79.5 90 top
R228  100  [0603-RES]  117.09,80.77 270 top
R229  2.2k  [0603-RES]  13.21,104.14 90 top
R230  1K  [0603-RES]  18.29,104.14 90 top
R231  100k  [0603-RES]  22.73,104.14 90 top
R232  10K  [0603-RES]  32.26,104.14 90 top
R233  10K  [0603-RES]  19.56,111.76 0 top
R234  10K  [0603-RES]  19.56,109.22 180 top
R235  10K  [0603-RES]  43.05,104.14 90 top
R236  100  [0603-RES]  41.15,104.14 90 top
R237  1K  [0603-RES]  20.83,119.38 90 top
R238  100k  [0603-RES]  30.99,119.38 90 top
R239  3.3k  [0603-RES]  28.45,119.38 270 top
R240  1K  [0603-RES]  25.91,119.38 90 top
R241  100k  [0603-RES]  33.53,119.38 270 top
R242  100  [0603-RES]  36.07,119.38 90 top
R243  2.2k  [0603-RES]  36.07,114.3 180 top
R244  22K  [0603-RES]  34.8,104.14 270 top
R245  100  [0603-RES]  23.37,119.38 90 top
R246  GAIN  [AXIAL-0.1EZ]  25.91,102.87 90 top
R247  100  [0603-RES]  29.72,104.14 270 top
R248  2.2k  [0603-RES]  56.9,104.14 90 top
R249  1K  [0603-RES]  61.98,104.14 90 top
R250  100k  [0603-RES]  66.42,104.14 90 top
R251  10K  [0603-RES]  75.95,104.14 90 top
R252  10K  [0603-RES]  63.25,111.76 0 top
R253  10K  [0603-RES]  63.25,109.22 180 top
R254  10K  [0603-RES]  86.74,104.14 90 top
R255  100  [0603-RES]  84.84,104.14 90 top
R256  1K  [0603-RES]  64.52,119.38 90 top
R257  100k  [0603-RES]  74.68,119.38 90 top
R258  3.3k  [0603-RES]  72.14,119.38 270 top
R259  1K  [0603-RES]  69.6,119.38 90 top
R260  100k  [0603-RES]  77.22,119.38 270 top
R261  100  [0603-RES]  79.76,119.38 90 top
R262  2.2k  [0603-RES]  79.76,114.3 180 top
R263  22K  [0603-RES]  78.49,104.14 270 top
R264  100  [0603-RES]  67.06,119.38 90 top
R265  GAIN  [AXIAL-0.1EZ]  69.6,102.87 90 top
R266  100  [0603-RES]  73.41,104.14 270 top
R267  2.2k  [0603-RES]  100.58,104.14 90 top
R268  1K  [0603-RES]  105.66,104.14 90 top
R269  100k  [0603-RES]  110.11,104.14 90 top
R270  10K  [0603-RES]  119.63,104.14 90 top
R271  10K  [0603-RES]  106.93,111.76 0 top
R272  10K  [0603-RES]  106.93,109.22 180 top
R273  10K  [0603-RES]  130.43,104.14 90 top
R274  100  [0603-RES]  128.52,104.14 90 top
R275  1K  [0603-RES]  108.2,119.38 90 top
R276  100k  [0603-RES]  118.36,119.38 90 top
R277  3.3k  [0603-RES]  115.82,119.38 270 top
R278  1K  [0603-RES]  113.28,119.38 90 top
R279  100k  [0603-RES]  120.9,119.38 270 top
R280  100  [0603-RES]  123.44,119.38 90 top
R281  2.2k  [0603-RES]  123.44,114.3 180 top
R282  22K  [0603-RES]  122.17,104.14 270 top
R283  100  [0603-RES]  110.74,119.38 90 top
R284  GAIN  [AXIAL-0.1EZ]  113.28,102.87 90 top
R285  100  [0603-RES]  117.09,104.14 270 top
R286  2.2k  [0603-RES]  144.27,10.67 90 top
R287  1K  [0603-RES]  149.35,10.67 90 top
R288  100k  [0603-RES]  153.8,10.67 90 top
R289  10K  [0603-RES]  163.32,10.67 90 top
R290  10K  [0603-RES]  150.62,18.29 0 top
R291  10K  [0603-RES]  150.62,15.75 180 top
R292  10K  [0603-RES]  174.12,10.67 90 top
R293  100  [0603-RES]  172.21,10.67 90 top
R294  1K  [0603-RES]  151.89,25.91 90 top
R295  100k  [0603-RES]  162.05,25.91 90 top
R296  3.3k  [0603-RES]  159.51,25.91 270 top
R297  1K  [0603-RES]  156.97,25.91 90 top
R298  100k  [0603-RES]  164.59,25.91 270 top
R299  100  [0603-RES]  167.13,25.91 90 top
R300  2.2k  [0603-RES]  167.13,20.83 180 top
R301  22K  [0603-RES]  165.86,10.67 270 top
R302  100  [0603-RES]  154.43,25.91 90 top
R303  GAIN  [AXIAL-0.1EZ]  156.97,9.4 90 top
R304  100  [0603-RES]  160.78,10.67 270 top
R305  2.2k  [0603-RES]  187.96,10.67 90 top
R306  1K  [0603-RES]  193.04,10.67 90 top
R307  100k  [0603-RES]  197.49,10.67 90 top
R308  10K  [0603-RES]  207.01,10.67 90 top
R309  10K  [0603-RES]  194.31,18.29 0 top
R310  10K  [0603-RES]  194.31,15.75 180 top
R311  10K  [0603-RES]  217.81,10.67 90 top
R312  100  [0603-RES]  215.9,10.67 90 top
R313  1K  [0603-RES]  195.58,25.91 90 top
R314  100k  [0603-RES]  205.74,25.91 90 top
R315  3.3k  [0603-RES]  203.2,25.91 270 top
R316  1K  [0603-RES]  200.66,25.91 90 top
R317  100k  [0603-RES]  208.28,25.91 270 top
R318  100  [0603-RES]  210.82,25.91 90 top
R319  2.2k  [0603-RES]  210.82,20.83 180 top
R320  22K  [0603-RES]  209.55,10.67 270 top
R321  100  [0603-RES]  198.12,25.91 90 top
R322  GAIN  [AXIAL-0.1EZ]  200.66,9.4 90 top
R323  100  [0603-RES]  204.47,10.67 270 top
R324  2.2k  [0603-RES]  231.65,10.67 90 top
R325  1K  [0603-RES]  236.73,10.67 90 top
R326  100k  [0603-RES]  241.17,10.67 90 top
R327  10K  [0603-RES]  250.7,10.67 90 top
R328  10K  [0603-RES]  238,18.29 0 top
R329  10K  [0603-RES]  238,15.75 180 top
R330  10K  [0603-RES]  261.49,10.67 90 top
R331  100  [0603-RES]  259.59,10.67 90 top
R332  1K  [0603-RES]  239.27,25.91 90 top
R333  100k  [0603-RES]  249.43,25.91 90 top
R334  3.3k  [0603-RES]  246.89,25.91 270 top
R335  1K  [0603-RES]  244.35,25.91 90 top
R336  100k  [0603-RES]  251.97,25.91 270 top
R337  100  [0603-RES]  254.51,25.91 90 top
R338  2.2k  [0603-RES]  254.51,20.83 180 top
R339  22K  [0603-RES]  253.24,10.67 270 top
R340  100  [0603-RES]  241.81,25.91 90 top
R341  GAIN  [AXIAL-0.1EZ]  244.35,9.4 90 top
R342  100  [0603-RES]  248.16,10.67 270 top
R343  2.2k  [0603-RES]  144.27,34.04 90 top
R344  1K  [0603-RES]  149.35,34.04 90 top
R345  100k  [0603-RES]  153.8,34.04 90 top
R346  10K  [0603-RES]  163.32,34.04 90 top
R347  10K  [0603-RES]  150.62,41.66 0 top
R348  10K  [0603-RES]  150.62,39.12 180 top
R349  10K  [0603-RES]  174.12,34.04 90 top
R350  100  [0603-RES]  172.21,34.04 90 top
R351  1K  [0603-RES]  151.89,49.28 90 top
R352  100k  [0603-RES]  162.05,49.28 90 top
R353  3.3k  [0603-RES]  159.51,49.28 270 top
R354  1K  [0603-RES]  156.97,49.28 90 top
R355  100k  [0603-RES]  164.59,49.28 270 top
R356  100  [0603-RES]  167.13,49.28 90 top
R357  2.2k  [0603-RES]  167.13,44.2 180 top
R358  22K  [0603-RES]  165.86,34.04 270 top
R359  100  [0603-RES]  154.43,49.28 90 top
R360  GAIN  [AXIAL-0.1EZ]  156.97,32.77 90 top
R361  100  [0603-RES]  160.78,34.04 270 top
R362  2.2k  [0603-RES]  187.96,34.04 90 top
R363  1K  [0603-RES]  193.04,34.04 90 top
R364  100k  [0603-RES]  197.49,34.04 90 top
R365  10K  [0603-RES]  207.01,34.04 90 top
R366  10K  [0603-RES]  194.31,41.66 0 top
R367  10K  [0603-RES]  194.31,39.12 180 top
R368  10K  [0603-RES]  217.81,34.04 90 top
R369  100  [0603-RES]  215.9,34.04 90 top
R370  1K  [0603-RES]  195.58,49.28 90 top
R371  100k  [0603-RES]  205.74,49.28 90 top
R372  3.3k  [0603-RES]  203.2,49.28 270 top
R373  1K  [0603-RES]  200.66,49.28 90 top
R374  100k  [0603-RES]  208.28,49.28 270 top
R375  100  [0603-RES]  210.82,49.28 90 top
R376  2.2k  [0603-RES]  210.82,44.2 180 top
R377  22K  [0603-RES]  209.55,34.04 270 top
R378  100  [0603-RES]  198.12,49.28 90 top
R379  GAIN  [AXIAL-0.1EZ]  200.66,32.77 90 top
R380  100  [0603-RES]  204.47,34.04 270 top
R381  2.2k  [0603-RES]  231.65,34.04 90 top
R382  1K  [0603-RES]  236.73,34.04 90 top
R383  100k  [0603-RES]  241.17,34.04 90 top
R384  10K  [0603-RES]  250.7,34.04 90 top
R385  10K  [0603-RES]  238,41.66 0 top
R386  10K  [0603-RES]  238,39.12 180 top
R387  10K  [0603-RES]  261.49,34.04 90 top
R388  100  [0603-RES]  259.59,34.04 90 top
R389  1K  [0603-RES]  239.27,49.28 90 top
R390  100k  [0603-RES]  249.43,49.28 90 top
R391  3.3k  [0603-RES]  246.89,49.28 270 top
R392  1K  [0603-RES]  244.35,49.28 90 top
R393  100k  [0603-RES]  251.97,49.28 270 top
R394  100  [0603-RES]  254.51,49.28 90 top
R395  2.2k  [0603-RES]  254.51,44.2 180 top
R396  22K  [0603-RES]  253.24,34.04 270 top
R397  100  [0603-RES]  241.81,49.28 90 top
R398  GAIN  [AXIAL-0.1EZ]  244.35,32.77 90 top
R399  100  [0603-RES]  248.16,34.04 270 top
R400  2.2k  [0603-RES]  144.27,57.4 90 top
R401  1K  [0603-RES]  149.35,57.4 90 top
R402  100k  [0603-RES]  153.8,57.4 90 top
R403  10K  [0603-RES]  163.32,57.4 90 top
R404  10K  [0603-RES]  150.62,65.02 0 top
R405  10K  [0603-RES]  150.62,62.48 180 top
R406  10K  [0603-RES]  174.12,57.4 90 top
R407  100  [0603-RES]  172.21,57.4 90 top
R408  1K  [0603-RES]  151.89,72.64 90 top
R409  100k  [0603-RES]  162.05,72.64 90 top
R410  3.3k  [0603-RES]  159.51,72.64 270 top
R411  1K  [0603-RES]  156.97,72.64 90 top
R412  100k  [0603-RES]  164.59,72.64 270 top
R413  100  [0603-RES]  167.13,72.64 90 top
R414  2.2k  [0603-RES]  167.13,67.56 180 top
R415  22K  [0603-RES]  165.86,57.4 270 top
R416  100  [0603-RES]  154.43,72.64 90 top
R417  GAIN  [AXIAL-0.1EZ]  156.97,56.13 90 top
R418  100  [0603-RES]  160.78,57.4 270 top
R419  2.2k  [0603-RES]  187.96,57.4 90 top
R420  1K  [0603-RES]  193.04,57.4 90 top
R421  100k  [0603-RES]  197.49,57.4 90 top
R422  10K  [0603-RES]  207.01,57.4 90 top
R423  10K  [0603-RES]  194.31,65.02 0 top
R424  10K  [0603-RES]  194.31,62.48 180 top
R425  10K  [0603-RES]  217.81,57.4 90 top
R426  100  [0603-RES]  215.9,57.4 90 top
R427  1K  [0603-RES]  195.58,72.64 90 top
R428  100k  [0603-RES]  205.74,72.64 90 top
R429  3.3k  [0603-RES]  203.2,72.64 270 top
R430  1K  [0603-RES]  200.66,72.64 90 top
R431  100k  [0603-RES]  208.28,72.64 270 top
R432  100  [0603-RES]  210.82,72.64 90 top
R433  2.2k  [0603-RES]  210.82,67.56 180 top
R434  22K  [0603-RES]  209.55,57.4 270 top
R435  100  [0603-RES]  198.12,72.64 90 top
R436  GAIN  [AXIAL-0.1EZ]  200.66,56.13 90 top
R437  100  [0603-RES]  204.47,57.4 270 top
R438  2.2k  [0603-RES]  231.65,57.4 90 top
R439  1K  [0603-RES]  236.73,57.4 90 top
R440  100k  [0603-RES]  241.17,57.4 90 top
R441  10K  [0603-RES]  250.7,57.4 90 top
R442  10K  [0603-RES]  238,65.02 0 top
R443  10K  [0603-RES]  238,62.48 180 top
R444  10K  [0603-RES]  261.49,57.4 90 top
R445  100  [0603-RES]  259.59,57.4 90 top
R446  1K  [0603-RES]  239.27,72.64 90 top
R447  100k  [0603-RES]  249.43,72.64 90 top
R448  3.3k  [0603-RES]  246.89,72.64 270 top
R449  1K  [0603-RES]  244.35,72.64 90 top
R450  100k  [0603-RES]  251.97,72.64 270 top
R451  100  [0603-RES]  254.51,72.64 90 top
R452  2.2k  [0603-RES]  254.51,67.56 180 top
R453  22K  [0603-RES]  253.24,57.4 270 top
R454  100  [0603-RES]  241.81,72.64 90 top
R455  GAIN  [AXIAL-0.1EZ]  244.35,56.13 90 top
R456  100  [0603-RES]  248.16,57.4 270 top
R457  2.2k  [0603-RES]  144.27,80.77 90 top
R458  1K  [0603-RES]  149.35,80.77 90 top
R459  100k  [0603-RES]  153.8,80.77 90 top
R460  10K  [0603-RES]  163.32,80.77 90 top
R461  10K  [0603-RES]  150.62,88.39 0 top
R462  10K  [0603-RES]  150.62,85.85 180 top
R463  10K  [0603-RES]  174.12,80.77 90 top
R464  100  [0603-RES]  172.21,80.77 90 top
R465  1K  [0603-RES]  151.89,96.01 90 top
R466  100k  [0603-RES]  162.05,96.01 90 top
R467  3.3k  [0603-RES]  159.51,96.01 270 top
R468  1K  [0603-RES]  156.97,96.01 90 top
R469  100k  [0603-RES]  164.59,96.01 270 top
R470  100  [0603-RES]  167.13,96.01 90 top
R471  2.2k  [0603-RES]  167.13,90.93 180 top
R472  22K  [0603-RES]  165.86,80.77 270 top
R473  100  [0603-RES]  154.43,96.01 90 top
R474  GAIN  [AXIAL-0.1EZ]  156.97,79.5 90 top
R475  100  [0603-RES]  160.78,80.77 270 top
R476  2.2k  [0603-RES]  187.96,80.77 90 top
R477  1K  [0603-RES]  193.04,80.77 90 top
R478  100k  [0603-RES]  197.49,80.77 90 top
R479  10K  [0603-RES]  207.01,80.77 90 top
R480  10K  [0603-RES]  194.31,88.39 0 top
R481  10K  [0603-RES]  194.31,85.85 180 top
R482  10K  [0603-RES]  217.81,80.77 90 top
R483  100  [0603-RES]  215.9,80.77 90 top
R484  1K  [0603-RES]  195.58,96.01 90 top
R485  100k  [0603-RES]  205.74,96.01 90 top
R486  3.3k  [0603-RES]  203.2,96.01 270 top
R487  1K  [0603-RES]  200.66,96.01 90 top
R488  100k  [0603-RES]  208.28,96.01 270 top
R489  100  [0603-RES]  210.82,96.01 90 top
R490  2.2k  [0603-RES]  210.82,90.93 180 top
R491  22K  [0603-RES]  209.55,80.77 270 top
R492  100  [0603-RES]  198.12,96.01 90 top
R493  GAIN  [AXIAL-0.1EZ]  200.66,79.5 90 top
R494  100  [0603-RES]  204.47,80.77 270 top
R495  2.2k  [0603-RES]  231.65,80.77 90 top
R496  1K  [0603-RES]  236.73,80.77 90 top
R497  100k  [0603-RES]  241.17,80.77 90 top
R498  10K  [0603-RES]  250.7,80.77 90 top
R499  10K  [0603-RES]  238,88.39 0 top
R500  10K  [0603-RES]  238,85.85 180 top
R501  10K  [0603-RES]  261.49,80.77 90 top
R502  100  [0603-RES]  259.59,80.77 90 top
R503  1K  [0603-RES]  239.27,96.01 90 top
R504  100k  [0603-RES]  249.43,96.01 90 top
R505  3.3k  [0603-RES]  246.89,96.01 270 top
R506  1K  [0603-RES]  244.35,96.01 90 top
R507  100k  [0603-RES]  251.97,96.01 270 top
R508  100  [0603-RES]  254.51,96.01 90 top
R509  2.2k  [0603-RES]  254.51,90.93 180 top
R510  22K  [0603-RES]  253.24,80.77 270 top
R511  100  [0603-RES]  241.81,96.01 90 top
R512  GAIN  [AXIAL-0.1EZ]  244.35,79.5 90 top
R513  100  [0603-RES]  248.16,80.77 270 top
R514  2.2k  [0603-RES]  144.27,104.14 90 top
R515  1K  [0603-RES]  149.35,104.14 90 top
R516  100k  [0603-RES]  153.8,104.14 90 top
R517  10K  [0603-RES]  163.32,104.14 90 top
R518  10K  [0603-RES]  150.62,111.76 0 top
R519  10K  [0603-RES]  150.62,109.22 180 top
R520  10K  [0603-RES]  174.12,104.14 90 top
R521  100  [0603-RES]  172.21,104.14 90 top
R522  1K  [0603-RES]  151.89,119.38 90 top
R523  100k  [0603-RES]  162.05,119.38 90 top
R524  3.3k  [0603-RES]  159.51,119.38 270 top
R525  1K  [0603-RES]  156.97,119.38 90 top
R526  100k  [0603-RES]  164.59,119.38 270 top
R527  100  [0603-RES]  167.13,119.38 90 top
R528  2.2k  [0603-RES]  167.13,114.3 180 top
R529  22K  [0603-RES]  165.86,104.14 270 top
R530  100  [0603-RES]  154.43,119.38 90 top
R531  GAIN  [AXIAL-0.1EZ]  156.97,102.87 90 top
R532  100  [0603-RES]  160.78,104.14 270 top
R533  2.2k  [0603-RES]  187.96,104.14 90 top
R534  1K  [0603-RES]  193.04,104.14 90 top
R535  100k  [0603-RES]  197.49,104.14 90 top
R536  10K  [0603-RES]  207.01,104.14 90 top
R537  10K  [0603-RES]  194.31,111.76 0 top
R538  10K  [0603-RES]  194.31,109.22 180 top
R539  10K  [0603-RES]  217.81,104.14 90 top
R540  100  [0603-RES]  215.9,104.14 90 top
R541  1K  [0603-RES]  195.58,119.38 90 top
R542  100k  [0603-RES]  205.74,119.38 90 top
R543  3.3k  [0603-RES]  203.2,119.38 270 top
R544  1K  [0603-RES]  200.66,119.38 90 top
R545  100k  [0603-RES]  208.28,119.38 270 top
R546  100  [0603-RES]  210.82,119.38 90 top
R547  2.2k  [0603-RES]  210.82,114.3 180 top
R548  22K  [0603-RES]  209.55,104.14 270 top
R549  100  [0603-RES]  198.12,119.38 90 top
R550  GAIN  [AXIAL-0.1EZ]  200.66,102.87 90 top
R551  100  [0603-RES]  204.47,104.14 270 top
R552  2.2k  [0603-RES]  231.65,104.14 90 top
R553  1K  [0603-RES]  236.73,104.14 90 top
R554  100k  [0603-RES]  241.17,104.14 90 top
R555  10K  [0603-RES]  250.7,104.14 90 top
R556  10K  [0603-RES]  238,111.76 0 top
R557  10K  [0603-RES]  238,109.22 180 top
R558  10K  [0603-RES]  261.49,104.14 90 top
R559  100  [0603-RES]  259.59,104.14 90 top
R560  1K  [0603-RES]  239.27,119.38 90 top
R561  100k  [0603-RES]  249.43,119.38 90 top
R562  3.3k  [0603-RES]  246.89,119.38 270 top
R563  1K  [0603-RES]  244.35,119.38 90 top
R564  100k  [0603-RES]  251.97,119.38 270 top
R565  100  [0603-RES]  254.51,119.38 90 top
R566  2.2k  [0603-RES]  254.51,114.3 180 top
R567  22K  [0603-RES]  253.24,104.14 270 top
R568  100  [0603-RES]  241.81,119.38 90 top
R569  GAIN  [AXIAL-0.1EZ]  244.35,102.87 90 top
R570  100  [0603-RES]  248.16,104.14 270 top
SJ1  Disable LED  [SJ_2S]  37.34,16.26 90 top
SJ2  Disable LED  [SJ_2S]  81.03,16.26 90 top
SJ3  Disable LED  [SJ_2S]  124.71,16.26 90 top
SJ4  Disable LED  [SJ_2S]  37.34,39.62 90 top
SJ5  Disable LED  [SJ_2S]  81.03,39.62 90 top
SJ6  Disable LED  [SJ_2S]  124.71,39.62 90 top
SJ7  Disable LED  [SJ_2S]  37.34,62.99 90 top
SJ8  Disable LED  [SJ_2S]  81.03,62.99 90 top
SJ9  Disable LED  [SJ_2S]  124.71,62.99 90 top
SJ10  Disable LED  [SJ_2S]  37.34,86.36 90 top
SJ11  Disable LED  [SJ_2S]  81.03,86.36 90 top
SJ12  Disable LED  [SJ_2S]  124.71,86.36 90 top
SJ13  Disable LED  [SJ_2S]  37.34,109.73 90 top
SJ14  Disable LED  [SJ_2S]  81.03,109.73 90 top
SJ15  Disable LED  [SJ_2S]  124.71,109.73 90 top
SJ16  Disable LED  [SJ_2S]  168.4,16.26 90 top
SJ17  Disable LED  [SJ_2S]  212.09,16.26 90 top
SJ18  Disable LED  [SJ_2S]  255.78,16.26 90 top
SJ19  Disable LED  [SJ_2S]  168.4,39.62 90 top
SJ20  Disable LED  [SJ_2S]  212.09,39.62 90 top
SJ21  Disable LED  [SJ_2S]  255.78,39.62 90 top
SJ22  Disable LED  [SJ_2S]  168.4,62.99 90 top
SJ23  Disable LED  [SJ_2S]  212.09,62.99 90 top
SJ24  Disable LED  [SJ_2S]  255.78,62.99 90 top
SJ25  Disable LED  [SJ_2S]  168.4,86.36 90 top
SJ26  Disable LED  [SJ_2S]  212.09,86.36 90 top
SJ27  Disable LED  [SJ_2S]  255.78,86.36 90 top
SJ28  Disable LED  [SJ_2S]  168.4,109.73 90 top
SJ29  Disable LED  [SJ_2S]  212.09,109.73 90 top
SJ30  Disable LED  [SJ_2S]  255.78,109.73 90 top
STANDOFF1  STAND-OFF  [STAND-OFF]  9.4,27.18 0 top
STANDOFF2  STAND-OFF  [STAND-OFF]  47.5,27.18 0 top
STANDOFF3  STAND-OFF  [STAND-OFF]  53.09,27.18 0 top
STANDOFF4  STAND-OFF  [STAND-OFF]  91.19,27.18 0 top
STANDOFF5  STAND-OFF  [STAND-OFF]  96.77,27.18 0 top
STANDOFF6  STAND-OFF  [STAND-OFF]  134.87,27.18 0 top
STANDOFF7  STAND-OFF  [STAND-OFF]  9.4,50.55 0 top
STANDOFF8  STAND-OFF  [STAND-OFF]  47.5,50.55 0 top
STANDOFF9  STAND-OFF  [STAND-OFF]  53.09,50.55 0 top
STANDOFF10  STAND-OFF  [STAND-OFF]  91.19,50.55 0 top
STANDOFF11  STAND-OFF  [STAND-OFF]  96.77,50.55 0 top